# Altium PCB Amoled.PcbDoc
Units mil, origin at the board's own origin, x right, y up, seen from the top; angles counter-clockwise.
Board outline 1771.65 x 1220.47 mil, 2 copper layers (Top Layer, Bottom Layer); 43 components, 36 nets, 216 pads, 78 vias.
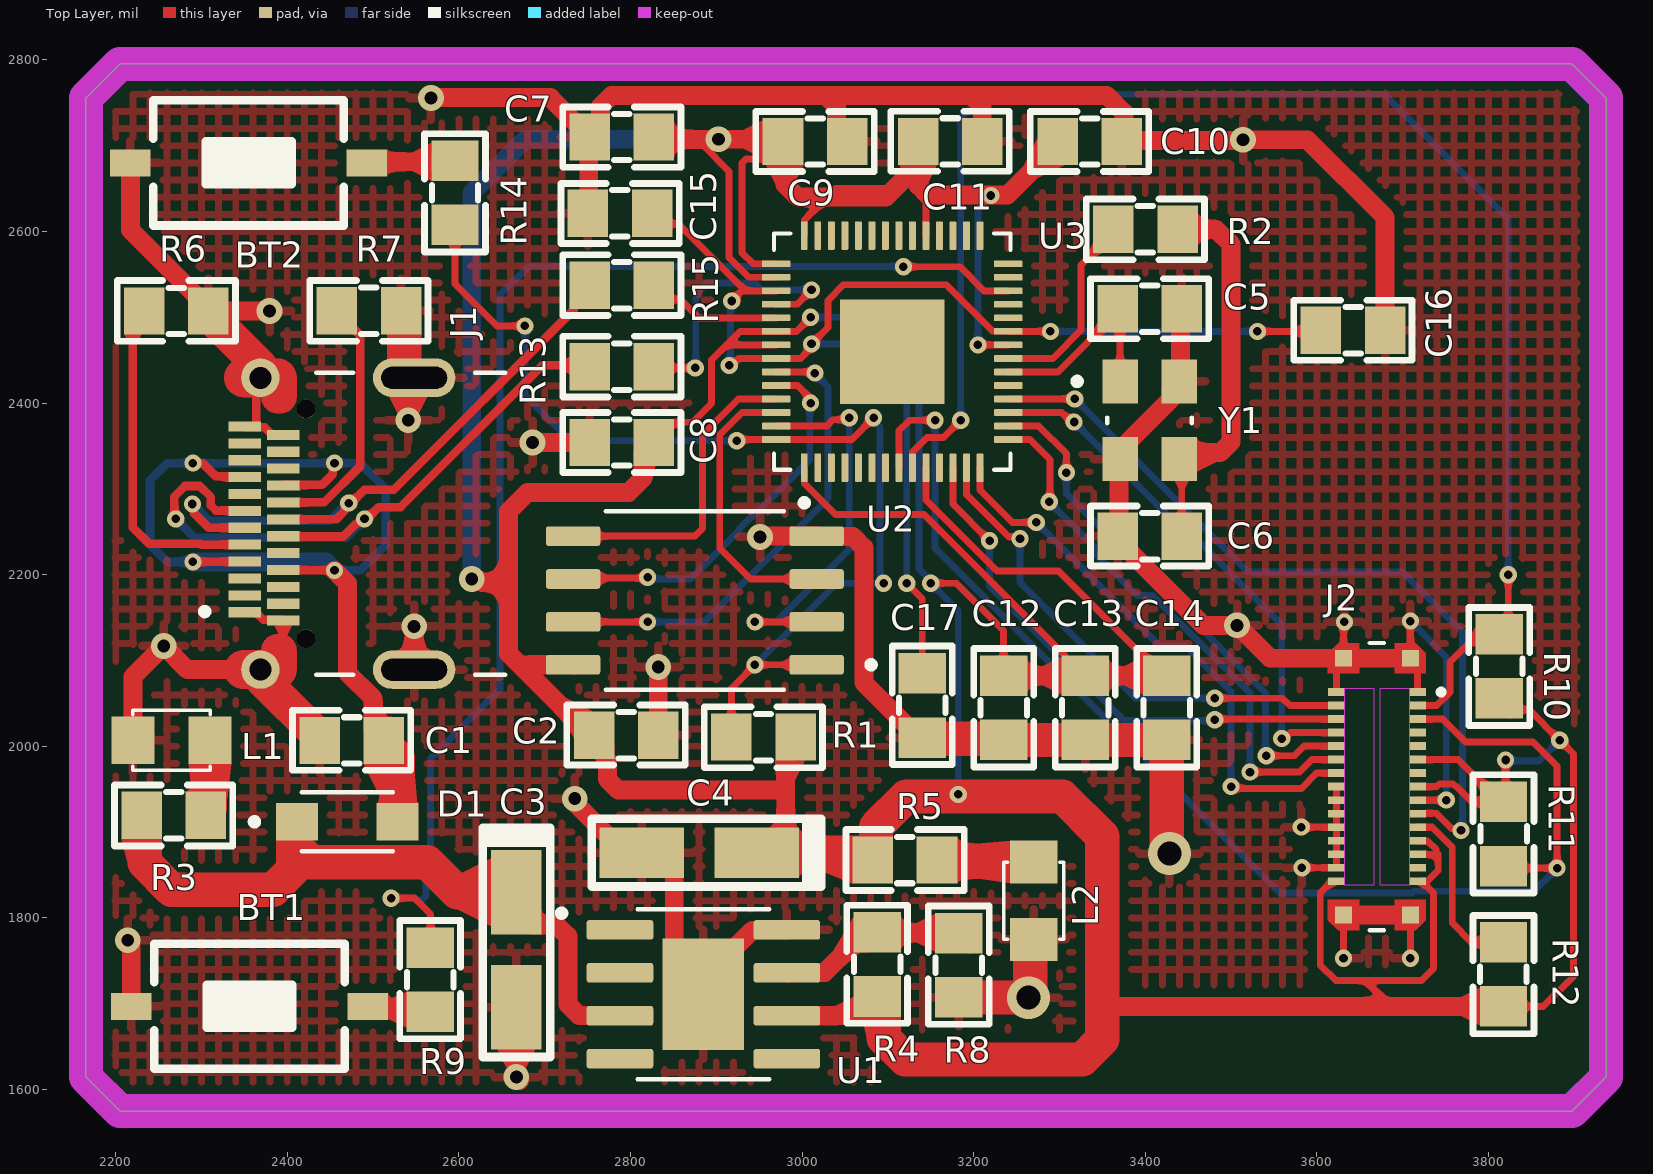
[diagram p0: Top Layer view]
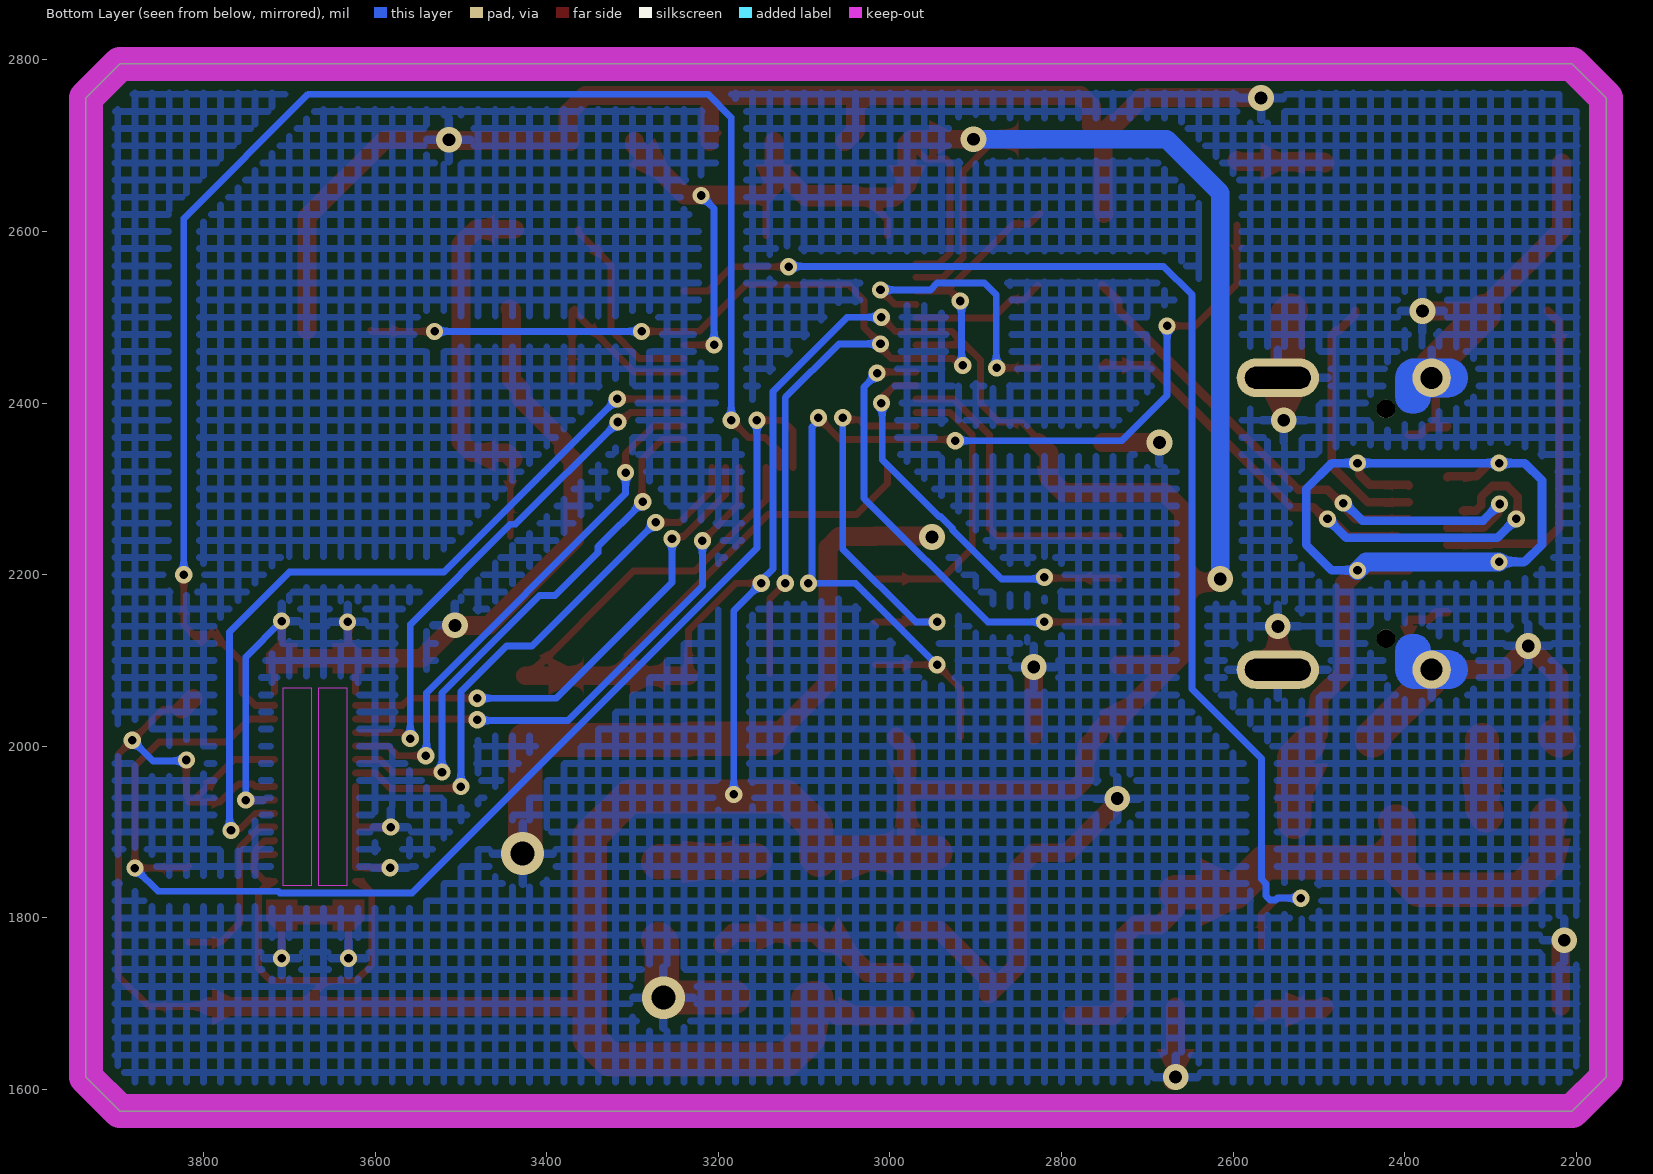
[diagram p1: Bottom Layer view, seen from below]
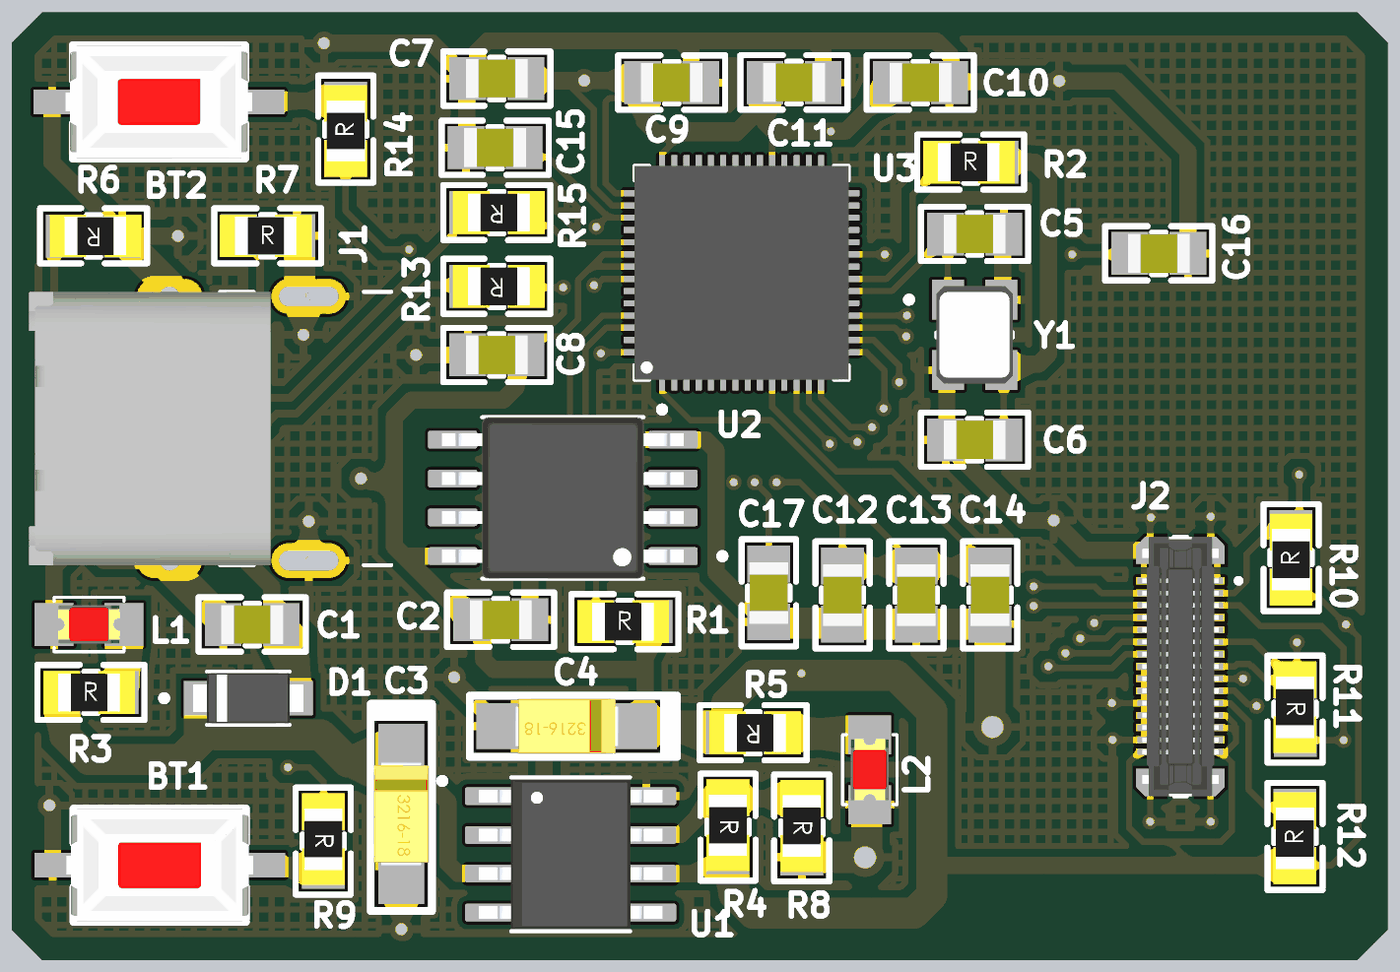
[diagram p2: 3D render of the assembled board from above, using the file's embedded part models]

## Layer stack, top to bottom
Top Solder: solder mask 0.4, Solder Resist, Dk 3.5
Top Layer: signal copper 1.4
Dielectric 1: dielectric 12.6, FR-4, Dk 4.8
Bottom Layer: signal copper 1.4
Bottom Solder: solder mask 0.4, Solder Resist, Dk 3.5

## Board outline
2165.35,1614.17 2165.35,2755.91 2204.72,2795.28 3897.64,2795.28 3937.01,2755.91 3937.01,1614.17 3897.64,1574.8 2204.72,1574.8

## Design rules (kind name [scope] priority, off if disabled: settings)
Clearance Clearance_1 [All vs InPolygon] p1: gap=10 ignorepadtopadclearanceinfootprint=FALSE
Clearance [All] p2: gap=1 ignorepadtopadclearanceinfootprint=FALSE
DiffPairsRouting [All] p1: maxlimit=10 minlimit=10 mostfreqgap=10 toplayer_minwidth=10 toplayer_maxwidth=10 toplayer_prefwidth=10 bottomlayer_minwidth=10 bottomlayer_maxwidth=10 bottomlayer_prefwidth=10 maxuncoupledlength=500
MinimumSolderMaskSliver [All] p1: minsoldermaskwidth=3
PolygonConnect [All] p1: connectstyle=Relief reliefconductorwidth=10 reliefentries=4 polygonreliefangle="90 Angle" airgapwidth=10
RoutingVias [All] p1: holewidth=15 width=30 viastyle="Through Hole" minholewidth=10 minwidth=20 maxholewidth=28 maxwidth=50
SolderMaskExpansion SolderMaskExpansion_1 [IsVia] p1: expansion=4 istentingtop=TRUE
SolderMaskExpansion [All] p2: expansion=4 istentingtop=FALSE
SupplyNets "Schematic Supply Nets_3" [InNet('1.1V')] p1: voltage=0.000
SupplyNets "Schematic Supply Nets_2" [InNet('5V')] p2: voltage=0.000
SupplyNets "Schematic Supply Nets_1" [InNet('GND')] p3: voltage=0.000
SupplyNets "Schematic Supply Nets" [InNet('3.3V')] p4: voltage=0.000
Width [All] p1: maxlimit=40 minlimit=8 preferedwidth=22
28 further rules are at their usual default settings.

## Classes and differential pairs
differential pair D: +D_P -D_N

## Components (designator, comment, footprint, x,y, rotation, side; value= is the part's Value field where it differs from the comment)
BT1 "Nut Nhan 2 Chan SMD 3x6x2.5" "Nut Nhan 2 Chan SMD 3x6x2.5" 2356,1697 r0 top
BT2 "Nut Nhan 2 Chan SMD 3x6x2.5" "Nut Nhan 2 Chan SMD 3x6x2.5" 2355,2680 r0 top
C1 "105" "tu 0805" 2475,2007 r0 top
C2 "225" "tu 0805" 2794.83,2013.13 r0 top
C3 "10uF" "tu tantalum smd3216" 2667,1762.93 r270 top
C4 "10uF" "tu tantalum smd3216" 2880,1875.98 r180 top
C5 "15pF" "tu 0805" 3405,2510 r0 top
C6 "15pF" "tu 0805" 3405,2245 r0 top
C7 "105" "tu 0805" 2790,2710 r180 top
C8 "104" "tu 0805" 2790,2354 r180 top
C9 "104" "tu 0805" 3015,2705 r0 top
C10 "104" "tu 0805" 3335,2705 r0 top
C11 "104" "tu 0805" 3172.43,2705.13 r0 top
C12 "104" "tu 0805" 3235.09,2045 r270 top
C13 "104" "tu 0805" 3330.04,2045 r270 top
C14 "104" "tu 0805" 3425,2045 r270 top
C15 "105" "tu 0805" 2787.87,2621 r180 top
C16 "104" "tu 0805" 3642,2485 r0 top
C17 "104" "tu 0805" 3140.13,2047.77 r270 top
D1 "Diode" SODFL3619X98N 2470,1912 r0 top
J1 "USB-C" USB-C 2498.62,2259.43 r90 top
J2 "AXE530127" PANASONIC_AXE530127 3670,1953 r270 top
L1 "LED 0805" LED-0805-Red 2310,2007 r180 top
L2 "LED 0805" LED-0805-Red 3270,1865 r270 top
R1 "Not Connect" "tro smd 0805" 2954.83,2013.13 r0 top
R2 "1k" "tro smd 0805" 3400,2605 r0 top
R3 "1k" "tro smd 0805" 2267.43,1921.95 r0 top
R4 "56k" "tro smd 0805" 3090,1745.98 r270 top
R5 "220R" "tro smd 0805" 3120,1865 r180 top
R6 "5.1k" "tro smd 0805" 2270.76,2505 r180 top
R7 "5.1k" "tro smd 0805" 2495,2510 r0 top
R8 "10k" "tro smd 0805" 3185,1745 r270 top
R9 "1k" "tro smd 0805" 2569,1728 r270 top
R10 "10k" "tro smd 0805" 3810,2093 r90 top
R11 "10k" "tro smd 0805" 3820,1898 r270 top
R12 "10k" "tro smd 0805" 3815,1734 r90 top
R13 "27R" "tro smd 0805" 2790,2440 r180 top
R14 "1k" "tro smd 0805" 2593,2645 r90 top
R15 "27R" "tro smd 0805" 2790,2535 r180 top
U1 "IC_RT9048GSP" "SOP-8(Exposed Pad)" 2885,1710.98 r0 top
U2 "W25Q128JVSIQ" SOIC127P790X216-8N 2875,2170 r180 top
U3 "RP2040" RP2040 3105,2460 r90 top
Y1 "Thach Anh ABM8" XTAL_ABM8-272-T3 3405,2380 r0 top

## Footprints (in the part's own frame and the unit in brackets; to place one, negate y for a bottom-side part, rotate by r counter-clockwise, add the part's x,y. Pads: shape width x height; smd on the part's side, far side on the other; paste and mask are expansions set on the pad)
LED-0805-Red [mil]
  rect 50x55 smd: 1(0,0) 2(90,0)
  silkscreen extent 0,-35 90,35, body extent 5,-25 85,25, height 43
"Nut Nhan 2 Chan SMD 3x6x2.5" [mm] "Switch SMD type"
  rect 1.2x0.8 smd: 1(-3.5,0) 2(3.5,0)
  silkscreen extent -2.82,-1.85 2.82,1.85, body extent -3.05,-1.85 3.05,1.85, height 2.5
PANASONIC_AXE530127 [mm]
  rect 0.23x0.5 smd paste-1: 1(-2.8,1.2) 2(-2.8,-1.2) 3(-2.4,1.2) 4(-2.4,-1.2) 5(-2,1.2) 6(-2,-1.2) 7(-1.6,1.2) 8(-1.6,-1.2) 9(-1.2,1.2) 10(-1.2,-1.2) 11(-0.8,1.2) 12(-0.8,-1.2) 13(-0.4,1.2) 14(-0.4,-1.2) 15(0,1.2) 16(0,-1.2) 17(0.4,1.2) 18(0.4,-1.2) 19(0.8,1.2) 20(0.8,-1.2) 21(1.2,1.2) 22(1.2,-1.2) 23(1.6,1.2) 24(1.6,-1.2) 25(2,1.2) 26(2,-1.2) 27(2.4,1.2) 28(2.4,-1.2) 29(2.8,1.2) 30(2.8,-1.2)
  rect 0.5x0.5 smd paste-1 mask+0: S1(-3.8,0.99) S2(-3.8,-0.99) S3(3.8,0.99) S4(3.8,-0.99)
  Top Layer region: -3.35,0.53 -4.25,0.53 -4.25,1.15 -3.95,1.45 -3.35,1.45
  Top Layer region: 4.25,1.15 4.25,0.53 3.35,0.53 3.35,1.45 3.95,1.45
  Top Layer region: 4.25,-1.15 3.95,-1.45 3.35,-1.45 3.35,-0.53 4.25,-0.53
  Top Layer region: -3.35,-1.45 -3.95,-1.45 -4.25,-1.15 -4.25,-0.53 -3.35,-0.53
  Keep-Out Layer region: 2.915,0.1 -2.915,0.1 -2.915,0.95 2.915,0.95
  Keep-Out Layer region: 2.915,-0.95 -2.915,-0.95 -2.915,-0.1 2.915,-0.1
  Keep-Out Layer region: 2.915,0.1 -2.915,0.1 -2.915,0.95 2.915,0.95
  Keep-Out Layer region: 2.915,-0.95 -2.915,-0.95 -2.915,-0.1 2.915,-0.1
  silkscreen extent -4.25,-0.21 4.25,1.98, body extent -4.25,-1.25 4.25,1.25, height 0.77
RP2040 [mm]
  rrect25% 0.84x0.2 smd: 1(-3.435,2.6) 2(-3.435,2.2) 3(-3.435,1.8) 4(-3.435,1.4) 5(-3.435,1) 6(-3.435,0.6) 7(-3.435,0.2) 8(-3.435,-0.2) 9(-3.435,-0.6) 10(-3.435,-1) 11(-3.435,-1.4) 12(-3.435,-1.8) 13(-3.435,-2.2) 14(-3.435,-2.6) 29(3.435,-2.6) 30(3.435,-2.2) 31(3.435,-1.8) 32(3.435,-1.4) 33(3.435,-1) 34(3.435,-0.6) 35(3.435,-0.2) 36(3.435,0.2) 37(3.435,0.6) 38(3.435,1) 39(3.435,1.4) 40(3.435,1.8) 41(3.435,2.2) 42(3.435,2.6)
  rrect25% 0.2x0.84 smd: 15(-2.6,-3.435) 16(-2.2,-3.435) 17(-1.8,-3.435) 18(-1.4,-3.435) 19(-1,-3.435) 20(-0.6,-3.435) 21(-0.2,-3.435) 22(0.2,-3.435) 23(0.6,-3.435) 24(1,-3.435) 25(1.4,-3.435) 26(1.8,-3.435) 27(2.2,-3.435) 28(2.6,-3.435) 43(2.6,3.435) 44(2.2,3.435) 45(1.8,3.435) 46(1.4,3.435) 47(1,3.435) 48(0.6,3.435) 49(0.2,3.435) 50(-0.2,3.435) 51(-0.6,3.435) 52(-1,3.435) 53(-1.4,3.435) 54(-1.8,3.435) 55(-2.2,3.435) 56(-2.6,3.435)
  rect 3.1x3.1 smd paste-0.57: 57(0,0)
  silkscreen extent -4.57,-3.5 3.5,3.5, body extent -3.5,-3.5 3.5,3.5, height 0.9
SODFL3619X98N [mm]
  rect 1.24x1.12 smd: A(1.49,0) K(-1.49,0)
  silkscreen extent -2.85,-0.87 1.35,0.87, body extent -1.8,-0.82 1.8,0.82, height 0.98
SOIC127P790X216-8N [mm]
  rrect25% 1.61x0.58 smd: 1(-3.605,1.905) 2(-3.605,0.635) 3(-3.605,-0.635) 4(-3.605,-1.905) 5(3.605,-1.905) 6(3.605,-0.635) 7(3.605,0.635) 8(3.605,1.905)
  silkscreen extent -5.32,-2.64 2.64,2.64, body extent -3.95,-2.64 3.95,2.64, height 2.16
"SOP-8(Exposed Pad)" [mm]
  rrect25% 1.97x0.58 smd: 1(-2.47,1.905) 2(-2.47,0.635) 3(-2.47,-0.635) 4(-2.47,-1.905) 5(2.47,-1.905) 6(2.47,-0.635) 7(2.47,0.635) 8(2.47,1.905)
  rect 2.413x3.302 smd paste-3: 9(0,0)
  silkscreen extent -4.3,-2.51 1.95,2.51, body extent -3,-2.45 3,2.45, height 1.75
"tro smd 0805" [mm]
  rect 1.2x1.4 smd: 1(-0.946,-0.061) 2(0.954,-0.061)
  silkscreen extent -1.75,-0.97 1.75,0.84, body extent -1.56,-0.76 1.44,0.64, height 0.53
"tu 0805" [mm] "Compoment SMD 80x50mil"
  rect 1.2x1.4 smd: 1(-0.946,-0.003) 2(0.954,-0.003)
  silkscreen extent -1.75,-0.89 1.75,0.89, body extent -1.01,-0.64 1.01,0.63, height 0.61
"tu tantalum smd3216" [mm]
  rect 2.5x1.5 smd: 1(-1.7,0) 2(1.7,0)
  silkscreen extent -3.61,-1 3.18,1, body extent -1.7,-0.9 1.7,0.9, height 1.69
USB-C [mm]
  rect 0.3x0.95 smd: A1(-2.62,3.765) A2(-2.12,3.765) A3(-1.62,3.765) A4(-1.12,3.765) A5(-0.62,3.765) A6(-0.12,3.765) A7(0.38,3.765) A8(0.88,3.765) A9(1.38,3.765) A10(1.88,3.765) A11(2.38,3.765) A12(2.88,3.765) B1(2.63,2.625) B2(2.13,2.625) B3(1.63,2.625) B4(1.13,2.625) B5(0.63,2.625) B6(0.13,2.625) B7(-0.37,2.625) B8(-0.87,2.625) B9(-1.37,2.625) B10(-1.87,2.625) B11(-2.37,2.625) B12(-2.87,2.625)
  round 1.14 hole 0.65 mask+0: SH1(-4.32,3.3) SH2(4.32,3.3)
  oval 1.14x2.44 hole 0.65 slot 1.95 at 90 deg: SH3(-4.32,-1.25) SH4(4.32,-1.25)
  round 0.55 hole 0.55 unplated: ""(-3.4,1.95) ""(3.4,1.95)
  Top Layer region: 156 vertices and 0 holes, not listed, extent -4.89,2.23 -3.272,4.37
  Top Layer region: 156 vertices and 0 holes, not listed, extent 3.272,2.23 4.89,4.37
  Bottom Layer region: 156 vertices and 0 holes, not listed, extent -4.89,2.23 -3.272,4.37
  Bottom Layer region: 156 vertices and 0 holes, not listed, extent 3.272,2.23 4.89,4.37
  silkscreen extent -4.47,-3.95 4.47,5.05, body extent -4.47,0 4.47,8.1, height 1.58
XTAL_ABM8-272-T3 [mm]
  rect 1.05x1.3 smd: 1(-0.875,1.15) 2(-0.875,-1.15) 3(0.875,-1.15) 4(0.875,1.15)
  silkscreen extent -2.24,-0.09 1.25,1.25, body extent -1.25,-1.6 1.25,1.6, height 0.7

## Part data
C1 C7 C15: library part "Tu 0805 105 50V 10%", "Dán", Chung_Loai=Dán, Don_Vi=Con, Ma_Hang=MH004552, So_Chan=2, Ten_Linh_Kien="Tụ 0805 105-1uF 10% 50V"
C2: library part "Tu 0805 225 25V 10%", "Dán", Chung_Loai=Dán, Don_Vi=Con, Ma_Hang=MH007483, So_Chan=2, Ten_Linh_Kien="Tụ 0805 225-2.2uF 25V 10%"
C3 C4: library part "Tu tantalum 10uF 16V SMD3216", "Dán", Chung_Loai=Dán, Don_Vi=Con, Ma_Hang=MH001954, So_Chan=2, Ten_Linh_Kien="Tụ tantalum 106C-10uF 16V SMD3216"
C5 C6: library part "Tu 0805 15pF 50V 10%", "Dán", Chung_Loai=Dán, Don_Vi=Con, Ma_Hang=MH004556, So_Chan=2, Ten_Linh_Kien="Tụ 0805 15P 10% 50V"
C8 C9 C10 C11 C12 C13 C14 C16 C17: library part "Tu 0805 104 50V 10%", "Dán", Chung_Loai=Dán, Don_Vi=Con, Ma_Hang=MH004551, So_Chan=2, Ten_Linh_Kien="Tụ 0805 104-100nF 10% 50V"
D1: library part Diode-MBR230LSFT1G, "Diode Schottky 30 V 2A Surface Mount SOD-123FL", Package="SOD-123FL-2 ON Semiconductor", Check_prices=https://www.snapeda.com/parts/MBR230LSFT1G/Onsemi/view-part/?ref=eda, MF="ON Semiconductor", MP=MBR230LSFT1G, SnapEDA_Link=https://www.snapeda.com/parts/MBR230LSFT1G/Onsemi/view-part/?ref=snap
J1: Package=None, Part Number=TE2345986-1, Availability=Unavailable, MP=2345986-1, Price=None
J2: "30 Position Connector Socket, Center Strip Contacts Surface Mount Gold", Package=None, Availability="In Stock", Check_prices=https://www.snapeda.com/parts/AXE530127/Panasonic/view-part/?ref=eda, MF="Panasonic Electric Works", MP=AXE530127, Price=None, Purchase-URL=https://pricing.snapeda.com/search/part/AXE530127/?ref=eda, SnapEDA_Link=https://www.snapeda.com/parts/AXE530127/Panasonic/view-part/?ref=snap
L1 L2: library part "LED 0805 Do", "Dán", Chung_Loai=Dán, Don_Vi=Con, Ma_Hang=MH000897, Ten_Linh_Kien="LED 0805 Màu Đỏ (Red)"
R1: library part "Tro 0805 5% 0R", "Dán", Chung_Loai=Dán, Don_Vi=Con, Ma_Hang=MH005230, So_Chan=2, Ten_Linh_Kien="Trở 0805 5% 0R"
R2 R3 R9 R14: library part "Tro 0805 5% 1k", "Dán", Chung_Loai=Dán, Don_Vi=Con, Ma_Hang=MH005234, So_Chan=2, Ten_Linh_Kien="Trở 0805 5% 1k"
R4: library part "Tro 0805 1% 510k", "Dán", Chung_Loai=Dán, Don_Vi=Con, Ma_Hang=MH005486, So_Chan=2, Ten_Linh_Kien="Trở 0805 1% 56k"
R5: library part "Tro 0805 5% 220R", "Dán", Chung_Loai=Dán, Don_Vi=Con, Ma_Hang=MH005259, So_Chan=2, Ten_Linh_Kien="Trở 0805 5% 220R"
R6 R7: library part "Tro 0805 1% 5.1k", "Dán", Chung_Loai=Dán, Don_Vi=Con, Ma_Hang=MH008812, So_Chan=2, Ten_Linh_Kien="Trở 0805 1% 5.1k"
R8 R10 R11 R12: library part "Tro 0805 1% 10k", "Dán", Chung_Loai=Dán, Don_Vi=Con, Ma_Hang=MH005473, So_Chan=2, Ten_Linh_Kien="Trở 0805 1% 10k"
R13 R15: library part "Tro 0805 1% 18k", "Dán", Chung_Loai=Dán, Don_Vi=Con, Ma_Hang=MH005477, So_Chan=2, Ten_Linh_Kien="Trở 0805 1% 27R"
U2: "FLASH - NOR Memory IC 128Mb (16M x 8) SPI - Quad I/O, QPI, DTR 133 MHz 8-SOIC", Package="SOIC-8 Winbond Electronics", Check_prices=https://www.snapeda.com/parts/W25Q128JVSIQ/Winbond/view-part/?ref=eda, MF="Winbond Electronics", MP=W25Q128JVSIQ, SnapEDA_Link=https://www.snapeda.com/parts/W25Q128JVSIQ/Winbond/view-part/?ref=snap
U3: "RP2040 chip for Raspberry Pi Pico - ARM® Cortex®-M0+ MCU 32-Bit", Package=None, Check_prices=https://www.snapeda.com/parts/RP2040/Raspberry+Pi/view-part/?ref=eda, MF="Raspberry Pi", MP=RP2040, SnapEDA_Link=https://www.snapeda.com/parts/RP2040/Raspberry+Pi/view-part/?ref=snap
Y1: "12 MHz Â±30ppm Crystal 10pF 50 Ohms 4-SMD, No Lead", Package="NON-STANDARD-4 Abracon", Check_prices=https://www.snapeda.com/parts/ABM8-272-T3/Abracon/view-part/?ref=eda, MF=ABRACON, MP=ABM8-272-T3, SnapEDA_Link=https://www.snapeda.com/parts/ABM8-272-T3/Abracon/view-part/?ref=snap
BT1 BT2: Ma_Hang=MH001036, Ten="Nút Nhấn 2 Chân 3x6x2.5MM SMD"

## Via types
v1: diameter 20, hole 10, Top Layer to Bottom Layer, tented both sides, 61 vias
v2: diameter 30, hole 15, Top Layer to Bottom Layer, tented both sides, 15 vias
v3: diameter 50, hole 28, Top Layer to Bottom Layer, tented both sides, 2 vias

## Nets (pads, with @x,y where several pads share a name; then routed paths per layer and width w, separated by ;. In a path a pad name is that pad's centre, name@x,y a point inside that pad or via, vN(x,y) a via of type N, cw(c..) or ccw(c..) an arc to the next point about the centre after c; other vN are vias at no path point)
1.1V: C15.1 C16.1 C17.1 U3.23 U3.45 U3.50 | length 1517.9
  Top Layer w8: C15.1 2837.27,2608.96 2856.04,2608.96 2934.13,2530.87 ; v1(2915.06,2443.94) 2918.31,2443.94 2926.5,2452.13 2998.3,2452.13 3008.7,2462.53 3008.7,2466.7 v1(3011,2469) 3030,2488 3030,2519.78 3048.22,2538 3168,2538 3222.32,2483.68 3240.17,2483.68 U3.23 v1(3289.38,2483.62) ; v1(2918,2519) 2929.87,2530.87 2934.13,2530.87 ; U3.45 2934.13,2530.87 ; v1(3122,2190) 3140,2172 C17.1 ; v1(3530.62,2483.62) 3603.53,2483.62 C16.1
  Bottom Layer w8: v1(2915.06,2443.94) 2916.53,2445.41 2916.53,2517.53 v1(2918,2519) ; v1(3011,2469) 3059.28,2469 3122,2406.28 v1(3122,2190) ; v1(3289.38,2483.62) v1(3530.62,2483.62)
3.3V: C2.1 C4.1 C7.1 C8.1 C9.1 C10.1 C11.1 C12.1 C13.1 C14.1 J2.11 J2.15 J2.23 J2.25 J2.29 J2.30 R1.2 R4.2 R5.2 R10.1 R11.1 R12.1 U1.6 U2.8 U3.1 U3.10 U3.22 U3.33 U3.42 U3.43 U3.44 U3.48 U3.49 | length 8448.9
  Top Layer w8: C8.1 2827.23,2358.07 2846.85,2377.69 2872.69,2377.69 2894.5,2399.5 2894.5,2450.25 2912.13,2467.87 ; C7.1 2829.86,2707.5 2837.36,2700 2885,2700 2915,2670 2915,2569.8 2938.18,2546.61 U3.44 ; U3.49 2912.13,2467.87 ; U3.43 2969.7,2562.43 2942.57,2562.43 2930,2575 2930,2680 2934.69,2684.69 2958.15,2684.69 C9.1@2973.18,2699.72 ; C9.1@2977.77,2704.31 C9.1 ; U3.1 3002.7,2324.7 3002.7,2306.41 3039.11,2270 3142.14,2270 3306.35,2105.79 3306.35,2101.85 C13.1@3325.97,2082.23 ; U3.42 3002.7,2595.3 3002.7,2613.59 3029.11,2640 3039.11,2650 3105,2650 3125.13,2670.13 ; v1(3010,2500) 2993.62,2483.62 U3.48 2927.87,2483.62 2912.13,2467.87 ; U3.10 3144.37,2286.89 3227.13,2204.13 3299.03,2204.13 C14.1@3420.93,2082.23 ; U3.33 3144.37,2637.29 3148.02,2640.94 ; v1(3150,2190) 3180,2190 3234.96,2135.04 C12.1 ; v1(3204.87,2467.87) U3.22 ; J2.30 3617.44,1842.76 3603.91,1829.24 3603.91,1745.09 3622,1727 3656,1727 ; 3686.23,1696.77 3656,1727 ; J2.29 3722.56,1842.76 3736.09,1829.24 3736.09,1741.09 3722,1727 3656,1727 ; J2.25 3717.77,1873.73 3741.47,1873.73 ; J2.23 3717.77,1889.48 3729.12,1889.48 3739.13,1879.47 3739.13,1876.08 3741.47,1873.73 ; J2.15 3739.63,1953 3742.88,1956.25 3758.62,1956.25 3761.87,1953 3762.87,1953 3780.64,1935.23 R11.1 ; J2.11 3764.4,1984.5 3813.67,1935.23 3820,1941.56 v1(3820,1984) ; J2.29@3722.56,1843.29 3729.12,1843.29 3741.47,1855.64 3741.47,1873.73 ; R12.1@3793.23,1696.77 R12.1 3863.77,1696.77 3899,1732 3899,1991 v1(3883,2007) 3847.27,2042.73 3829.37,2042.73 R10.1@3826.98,2045.12 ; R10.1 R10.1@3816.33,2055.77
  Top Layer w22: v2(2615,2195) 2616.53,2193.47 2624.36,2193.47 2626.89,2190.94 2658,2190.94 ; U2.8@2733.61,2094.58 2733.19,2095 U2.8 2670.89,2095 ; C8.1 2814.76,2341.66 2814.76,2312.76 2798,2296 2680,2296 2658,2274 2658,2190.94 ; C7.1@2829.86,2707.5 v2(2902.5,2707.5) 2975.14,2707.5 C9.1 2980,2702.64 2980,2655 2995,2640 3029.11,2640 3097.76,2640 3127.89,2670.13 ; C4.1@2975.17,1887.68 2981,1893.51 2981,1951 ; U1.6@2982.66,1686.4 U1.6 3061.24,1685.98 3080.05,1704.79 R4.2@3091.08,1704.79 ; R1.2 2981,1999.33 2981,1951 ; R4.2@3085.6,1706.4 R4.2 ; C11.1 3135.2,2653.76 3146.48,2642.48 ; 3148.02,2640.94 3146.48,2642.48 ; C12.1 3325.97,2082.23 C13.1 3420.93,2082.23 C14.1 ; C10.1 3297.77,2700.93 3239.32,2642.48 3146.48,2642.48 ; 3350,1696 3350.77,1696.77 3686.23,1696.77 R12.1@3793.23,1696.77 ; R10.1 R10.1@3825.02,2043.15 ; 2658,2190.94 2658,2107.89 2670.89,2095 ; 2670.89,2095 2736.33,2029.56 2744.98,2029.56 2757.61,2016.94 C2.1 2770.23,2000.38 2770.23,1986.33 2773,1983.55 2773,1961.89 2785.89,1949 2979,1949 2981,1951
  Top Layer w40: C4.1 3077.77,1875.98 3082.43,1871.33 R5.2 3086.05,1871.02 3086.05,1906.05 3121.53,1941.53 3303.47,1941.53 3350,1895 3350,1696 3350,1658.43 3326.57,1635 3120,1635 3095.12,1659.88 3095.12,1704.79 3091.08,1704.79 3089.47,1706.4 R4.2@3085.6,1706.4
  Bottom Layer w8: v1(3010,2500) 3050,2500 3136.39,2413.61 3136.39,2206.86 3150,2193.25 v1(3150,2190) 3182,2158 v1(3182,1944) ; v1(3204.87,2467.87) 3204.87,2626.87 v1(3220,2642) ; v1(3820,1984) 3821,1983 3859,1983 v1(3883,2007)
  Bottom Layer w22: v2(2615,2195) 2615,2645 2677.5,2707.5 v2(2902.5,2707.5)
5V: C3.1 D1.K R3.1 U1.3 | length 833.1
  Top Layer w22: C3.1 2667,1810.17 2685.53,1791.65 2714.11,1791.65 2727,1778.76 2727,1699.29 2739.89,1686.4 2787.34,1686.4 U1.3
  Top Layer w40: R3.1 2233.82,1915.94 2233.82,1864.18 2265,1833 2383.5,1833 2406.93,1856.43 2406.93,1886 ; D1.K 2408.98,1912 2406.93,1909.95 2406.93,1886 ; C3.1 2598.14,1829.86 2563.05,1864.95 2427.98,1864.95 2406.93,1886
Amoled_CLK: J2.4 U3.13 | length 594.2
  Top Layer w8: U3.13 3191.61,2293.39 3240.7,2244.3 3251.7,2244.3 v1(3254,2242) ; v1(3481,2056) 3560,2056 3568.51,2047.49 J2.4
  Bottom Layer w8: v1(3254,2242) 3254,2191 3389,2056 v1(3481,2056)
Amoled_CS: J2.6 U3.12 | length 625.7
  Top Layer w8: U3.12 3175.87,2282.26 v1(3218.57,2239.57) ; v1(3481,2031) 3481.74,2031.74 J2.6
  Bottom Layer w8: v1(3218.57,2239.57) 3218.57,2186.99 3233,2172.56 3233,2172 3375,2030 3480,2030 v1(3481,2031)
Amoled_RST: J2.19 U3.18 | length 933.3
  Top Layer w8: U3.18 v1(3317.88,2404.88) ; J2.19 3717.77,1922.03 3739.1,1922.03 3756.83,1904.3 3765.7,1904.3 v1(3768,1902)
  Bottom Layer w8: v1(3317.88,2404.88) 3519.76,2203 3700,2203 3769.75,2133.25 3769.75,1903.75 v1(3768,1902)
Amoled_SI1: J2.12 U3.15 | length 637.2
  Top Layer w8: U3.15 3265.36,2357.64 3289,2334 3289,2286 v1(3288,2285) ; v1(3522,1970) 3580,1970 3594.5,1984.5 J2.12
  Bottom Layer w8: v1(3288,2285) 3340.36,2232.64 3340.36,2225.64 3390.43,2175.57 3408.43,2175.57 3522,2062 v1(3522,1970)
Amoled_SI2: J2.10 U3.16 | length 616.1
  Top Layer w8: U3.16 3275.61,2373.39 3308,2341 v1(3308,2319) ; v1(3541,1989) 3574,1989 3585.24,2000.24 J2.10
  Bottom Layer w8: v1(3308,2319) 3308,2294.38 3540,2062.38 3540,1990 v1(3541,1989)
Amoled_SI3: J2.8 U3.17 | length 620.8
  Top Layer w8: U3.17 3302.62,2389.13 3313.75,2378 v1(3317,2378) ; v1(3559,2009) 3562.25,2009 3569.24,2015.99 J2.8
  Bottom Layer w8: v1(3317,2378) 3436.15,2258.85 3442.15,2258.85 3559,2142 v1(3559,2009)
Amoled_SIO0: J2.14 U3.14 | length 657.8
  Top Layer w8: U3.14 3207.36,2298.64 3245,2261 v1(3273,2261) ; v1(3500,1953) 3502,1951 3582,1951 3599.75,1968.75 J2.14
  Bottom Layer w8: v1(3273,2261) 3417,2117 3446.87,2117 3500,2063.87 v1(3500,1953)
D_N: J1.A7 J1.B7 R13.2 | length 780.9
  Top Layer w10: v1(2270,2265) 2268.38,2266.62 2268.38,2291.08 2280.69,2303.38 2298.08,2303.38 2311,2290.47 2311,2280.56 2316.86,2274.7 J1.A7@2332.14,2274.7 ; J1.B7@2408.69,2244.54 2465.3,2244.54 2480.76,2260 2482.29,2260 2487.29,2265 2492.71,2265 2506.49,2278.79 2532.07,2278.79 2697.19,2443.9 2744.98,2443.9 2747.95,2446.87 R13.2
  Bottom Layer w10: v1(2270,2265) 2291.97,2243.03 2468.03,2243.03 v1(2490,2265)
D_P: J1.A6 J1.B6 R15.2 | length 754.6
  Top Layer w10: v1(2289.38,2282.38) 2291,2280.77 2291,2272.27 2308.57,2254.7 J1.A6 ; J1.B6 2457.02,2264.54 2466.62,2274.14 2466.62,2275.68 2471.62,2280.68 v1(2471.62,2283.38) 2474.32,2283.38 2489.72,2298.79 2523.79,2298.79 2733.8,2508.8 2733.8,2518.77 R15.2
  Bottom Layer w10: v1(2289.38,2282.38) 2308.74,2263.03 2449.54,2263.03 2469.9,2283.38 v1(2471.62,2283.38)
GND: BT1.1 BT2.1 C1.1 C2.2 C3.2 C4.2 C5.2 C6.1 C7.2 C8.2 C9.2 C10.2 C11.2 C12.2 C13.2 C14.2 C15.2 C16.2 C17.2 J1.A1 J1.A12 J1.B1 J1.B12 J1.SH1 J1.SH2 J1.SH3 J1.SH4 J2.1 J2.2 J2.16 J2.17 J2.18 J2.20 J2.22 J2.24 J2.26 J2.28 J2.S1 J2.S2 J2.S3 J2.S4 L1.2 L2.2 R6.1 R7.2 R8.2 U1.8 U1.9 U2.4 Y1.2 Y1.4 | length 6022.2
  Top Layer w8: C9.2 C9.2@3054.74,2707.03 ; C11.2@3200.13,2714.87 C11.2 C11.2@3219.87,2714.87 ; C10.2@3365.26,2712.18 C10.2 ; v1(3581.76,1905.76) J2.22 ; v1(3582.51,1858.51) J2.28 J2.26 J2.24 J2.22 ; J2.16 J2.18 J2.20 J2.22 ; J2.2 3622.76,2094.34 J2.S2 3631.02,2144.02 v1(3632,2145) ; v1(3631.02,1753.02) J2.S4 ; v1(3708.98,1752.98) J2.S3 ; v1(3708.98,2145.98) J2.S1 3717.24,2094.34 J2.1 ; J2.17 v1(3750.75,1937.25)
  Top Layer w10: J1.A1 2363.19,2156.28 2372.13,2147.34 2394.37,2147.34 J1.B12 2395.28,2115.92 J1.SH1 ; J1.SH2 2363.83,2424.63 2363.83,2373.72 2362.92,2372.81 J1.A12 2351.3,2371.91 2373.54,2371.91 2382.48,2362.97 J1.B1
  Top Layer w22: v2(2214,1774) 2218.2,1769.8 BT1.1 ; BT2.1 2217.2,2602.12 2307.99,2511.33 R6.1 v2(2379.39,2507.39) ; L1.2 2220,2081 v2(2256,2117) 2283.65,2089.35 J1.SH1 ; v2(2541,2380) 2541,2422.67 J1.SH4 ; J1.SH3 v2(2547.83,2139.83) ; v2(2567.41,2755.59) 2567.82,2756 2706.56,2756 2735.87,2726.69 2739.8,2726.69 2752.43,2714.07 C7.2 ; C3.2 v2(2667,1614.49) v2@2671,1610.49 ; v2(2685.87,2354.13) C8.2 ; v2(2735,1939) 2735,1934.37 2793.39,1875.98 C4.2 2832.47,1875.98 2851,1857.46 2851,1744.98 U1.9 2885,1728.48 2942.08,1785.57 2981.83,1785.57 U1.8 ; C15.2 2751.36,2622.2 2751.36,2709.07 C7.2 ; C2.2 v2(2832.41,2092.41) ; v2(2951,2244) 2952,2245 U2.4 3017.35,2244.58 3059.11,2244.58 3072,2231.7 3072,2074.26 3136.06,2010.2 C17.2 ; C9.2 3040,2717.44 3040,2745.7 3027.11,2758.59 ; C11.2 3210,2745.7 3197.11,2758.59 ; C10.2 C10.2@3374.71,2707 ; C5.2 3441.01,2508.3 3441.01,2426.84 Y1.4 3429.78,2415.61 3429.78,2404.78 3380.22,2355.22 3380.22,2344.39 Y1.2 3369.16,2333.33 3369.16,2246.26 C6.1 3367.77,2240.93 3467.7,2141 v2(3507,2141) 3545.39,2102.61 J2.S2 J2.S1 ; J2.S4 J2.S3 ; C16.2 3679.57,2616.43 3589,2707 v2(3514,2707) 3512.93,2705.93 3375.78,2705.93 C10.2@3374.71,2707 ; C7.2 2765.05,2722.76 2765.05,2745.7 2777.93,2758.59 3027.11,2758.59 ; 3027.11,2758.59 3197.11,2758.59 ; 3197.11,2758.59 3355,2758.59 3375,2738.59 3375,2707.29 C10.2@3374.71,2707
  Top Layer w40: L1.2 L1.2@2225,2012 ; R6.1 2307.99,2503.46 2367.77,2443.68 2367.77,2430.44 J1.SH2 ; J1.SH1@2367.77,2088.41 J1.SH1 2369.63,2088.41 2369.63,2078.94 2437.77,2010.8 C1.1 C1.1@2434.15,2010.49 ; R7.2 2536.2,2503.98 2536.2,2431.76 2538.45,2429.5 J1.SH4 ; C17.2 3141.39,2008.81 3233.57,2008.81 C12.2 C13.2 C14.2 3424.87,1878.13 v3(3428,1875) ; R8.2 3182.82,1707.21 3263.79,1707.21 v3(3264,1707) 3265.91,1708.91 3265.91,1770.91 L2.2
  Bottom Layer w8: v1(3708.98,2145.98) 3750.75,2104.2 v1(3750.75,1937.25)
  Bottom Layer w22: v2@2950.72,2244 v2(2951,2244)
NetBT1_2: BT1.2 R9.2 | length 75.5
  Top Layer w22: BT1.2 2497.08,1693.71 2563.32,1693.71 R9.2
NetBT2_2: BT2.2 R14.2 | length 103.7
  Top Layer w22: BT2.2 2494.08,2681.29 2594.11,2681.29 R14.2
NetC6_2: C6.2 R2.2 Y1.3 | length 459.8
  Top Layer w8: Y1.3 3442.57,2331.6 C6.2
  Top Layer w22: R2.2 3482.39,2602.61 3500,2585 3500,2355 3487.11,2342.11 3446.84,2342.11 Y1.3
NetJ1_A5: J1.A5 R6.2 | length 396.5
  Top Layer w10: R6.2 2220,2494.2 2220,2255 2239,2236 2298.7,2236 2299.68,2235.02 J1.A5
NetJ1_B5: J1.B5 R7.1 | length 301.2
  Top Layer w10: J1.B5 2442.76,2284.23 2485,2326.47 2485,2479.19 2479.14,2485.05 2476.39,2485.05 2457.77,2503.67 R7.1
NetJ2_21: J2.21 R12.2 | length 207.3
  Top Layer w8: J2.21 3734.24,1905.76 3757.79,1882.21 3757.79,1794.21 3780.43,1771.57 R12.2
NetL1_1: L1.1 R3.2 | length 89.5
  Top Layer w40: R3.2 2305,1923.5 2310,1928.5 L1.1
NetL2_1: L2.1 R5.1 | length 113.8
  Top Layer w40: R5.1 3158.43,1866.2 3268.8,1866.2 L2.1
NetR4_1: R4.1 R8.1 U1.7 | length 242.1
  Top Layer w22: U1.7 2982.66,1736.4 3026.4,1736.4 3060.59,1770.59 3074.98,1770.59 R4.1 ; R4.1@3091.54,1783.21 R4.1 ; R8.1@3195.23,1769.61 R8.1 3182.11,1782.72 3088.1,1782.72 R4.1
NetR9_1: R9.1 U3.26 | length 1490.4
  Top Layer w8: v1(2521,1823) 2548.31,1823 2567,1804.31 2567,1765.62 R9.1 ; v1(3118,2559) 3184,2559 3212.13,2530.87 U3.26
  Bottom Layer w8: v1(2521,1823) 2548.31,1823 2550.23,1821.08 2556.86,1821.08 2561.55,1825.77 2561.55,1839.8 2567,1845.25 2567,1986 2648,2067 2648,2526.39 2681,2559.39 3117.61,2559.39 v1(3118,2559)
NetR13_1: R13.1 U3.46 | length 326.4
  Top Layer w8: R13.1 2828.62,2441 v1(2875.5,2441) ; U3.46 2969.83,2515.18 2994.18,2515.18 v1(3011,2532)
  Bottom Layer w8: v1(2875.5,2441) 2876,2441.5 2876,2526 2890,2540 2944.88,2540 2952.88,2532 v1(3011,2532)
NetR15_1: R15.1 U3.47 | length 158.3
  Top Layer w8: R15.1 2843.79,2520.84 2858.16,2520.84 2879.63,2499.37 U3.47
QSPI_SCLK: U2.6 U3.52 | length 454.7
  Top Layer w8: U2.6 2734.07,2196 2819,2196 v1(2820,2197) ; U3.52 2994.77,2420.63 3007.7,2407.7 3007.7,2402.3 v1(3010,2400)
  Bottom Layer w8: v1(2820,2197) 2822,2195 2870,2195 2927,2252 2927,2253.94 2941.06,2268 2943,2268 3009,2334 3009,2399 v1(3010,2400)
QSPI_SD0: U2.5 U3.53 | length 366.8
  Top Layer w8: U2.5 2875,2245 2884,2254 2884,2363 2925.82,2404.82 2969.7,2404.82 U3.53
QSPI_SD1: U2.2 U3.55 | length 459.2
  Top Layer w8: v1(2945,2145) U2.2 ; U3.55 U3.55 3029,2373.45 3036.23,2380.68 3052.7,2380.68 v1(3055,2382.98)
  Bottom Layer w8: v1(2945,2145) 2969.87,2145 3055,2230.13 v1(3055,2382.98)
QSPI_SD2: U2.3 U3.54 | length 336.4
  Top Layer w8: U3.54 2969.7,2389.07 2930.07,2389.07 2904,2363 2904,2231 2940,2195 U2.3
QSPI_SD3: U2.7 U3.51 | length 554.6
  Top Layer w8: U2.7 v1(2820,2145) ; U3.51 3013.62,2436.38 v1(3015,2435)
  Bottom Layer w8: v1(2820,2145) 2885.94,2145 3030,2289.06 3030,2418.89 3015,2433.89 v1(3015,2435)
QSPI_SS_N: R1.1 R14.1 U2.1 U3.56 | length 1244.2
  Top Layer w8: R14.1 2595.39,2538.85 2644.25,2490 v1(2677,2490) ; R1.1 2917.61,2067.61 v1(2945,2095) U2.1 ; v1(2923.93,2356.07) 2925.44,2357.57 2969.7,2357.57 U3.56 3057.95,2357.64 v1(3083.28,2382.98)
  Bottom Layer w8: v1(2677,2490) 2677,2409 2729.93,2356.07 v1(2923.93,2356.07) ; v1(2945,2095) 3040,2190 v1(3095,2190) ; v1(3083.28,2382.98) 3083.28,2379.73 3091,2372.01 v1@3091,2190
TP_SCL: J2.3 R10.2 U3.9 | length 1820.2
  Top Layer w8: U3.9 3128.68,2324.83 3128.68,2343.12 3145.57,2360 3165,2360 v1(3185,2380) ; J2.3@3717.76,2048 J2.3 3739.49,2047.49 3755,2063 3755,2098 3787.57,2130.57 R10.2 ; R10.2@3790.35,2133 R10.2@3800.61,2122.73 ; R10.2@3802.58,2120.76 R10.2 ; v1(3823,2200) 3823,2141.18 R10.2
  Bottom Layer w8: v1(3185,2380) 3185,2733 3212,2760 3678,2760 3823,2615 v1(3823,2200)
TP_SDA: J2.5 R11.2 U3.8 | length 1511.9
  Top Layer w8: U3.8 3112.87,2367.87 3125,2380 v1(3155,2380) ; J2.5 3746.26,2031.74 3773,2005 3852,2005 3880,1977 v1(3880,1858) 3820.03,1858 R11.2
  Bottom Layer w8: v1(3155,2380) 3155,2230.97 3556.73,1829.24 3711.13,1829.24 3712.99,1831.09 3853.09,1831.09 v1@3877.5,1855.5 ; v1@3880,1853 v1(3880,1858)
VBUS: C1.2 D1.A J1.A4 J1.A9 J1.B4 J1.B9 | length 1340.8
  Top Layer w10: v1(2290,2215) 2290.17,2215.17 2350.23,2215.17 J1.A4 ; v1(2290,2330) 2301.35,2330 2316.69,2314.66 2349.49,2314.66 J1.A9 ; J1.B9 2395.52,2205.24 2454.76,2205.24 v1(2455,2205) ; J1.B4 2396.18,2304.82 2440.72,2304.82 2453.09,2317.18 2453.09,2328.09 v1(2455,2330) ; C1.2@2512.57,2002.93 C1.2
  Top Layer w22: v1(2455,2205) 2470,2190 2470,2085.81 2499.95,2055.86 2499.95,2019.49 C1.2 ; C1.2@2500.39,2015.12 C1.2@2512.57,2002.93
  Top Layer w40: C1.2@2512.57,2002.93 2528.66,1986.84 D1.A
  Bottom Layer w10: v1(2290,2215) 2260,2215 2240,2235 2240,2310 2260,2330 v1(2290,2330) v1(2455,2330) 2485,2330 2515,2300 2515,2235 2485.18,2205.18 2455.18,2205.18 v1(2455,2205)
  Bottom Layer w22: v1(2290,2215) 2445,2215 v1(2455,2205)
XIN: C5.1 U3.20 Y1.1 | length 246
  Top Layer w8: U3.20 3298.22,2436.38 3367.77,2505.93 C5.1 3370.55,2507.09 Y1.1
XOUT: R2.1 U3.21 | length 231.6
  Top Layer w8: U3.21 3240.3,2452.19 3292.19,2452.19 3325,2485 3325,2560.9 3362.77,2598.67 R2.1
pads on no net: J1. J1.A2 J1.A3 J1.A8 J1.A10 J1.A11 J1.B2 J1.B3 J1.B8 J1.B10 J1.B11 J2.7 J2.9 J2.13 J2.27 U1.1 U1.2 U1.4 U1.5 U3.2 U3.3 U3.4 U3.5 U3.6 U3.7 U3.11 U3.19 U3.24 U3.25 U3.27 U3.28 U3.29 U3.30 U3.31 U3.32 U3.34 U3.35 U3.36 U3.37 U3.38 U3.39 U3.40 U3.41 U3.57

## Polygon pours and split planes (outlines as drawn)
GND on Bottom Layer "GND_L02_P000" (hatched 90Degree grid 20 track 8, remove dead copper, pour order 0): 2132,2830 2162,2860 3961,2860 3961,1547 3915,1501 2117,1501
GND on Top Layer "GND_L01_P003" (hatched 90Degree grid 20 track 8, remove dead copper, pour order 3): 2119,2783 2197,2783 2259,2845 2273,2831 3961,2831 3961,1589 3904,1532 3898,1538 2146,1538

## Keep-outs
Keep-Out Layer:
  the board outline again, w39.37